# Altium PCB KC_Input_VAS.PcbDoc
Units mil, origin at the board's own origin, x right, y up, seen from the top; angles counter-clockwise.
Board outline 3000 x 1500 mil, 2 copper layers (Top Layer, Bottom Layer); 47 components, 30 nets, 106 pads, 0 vias.
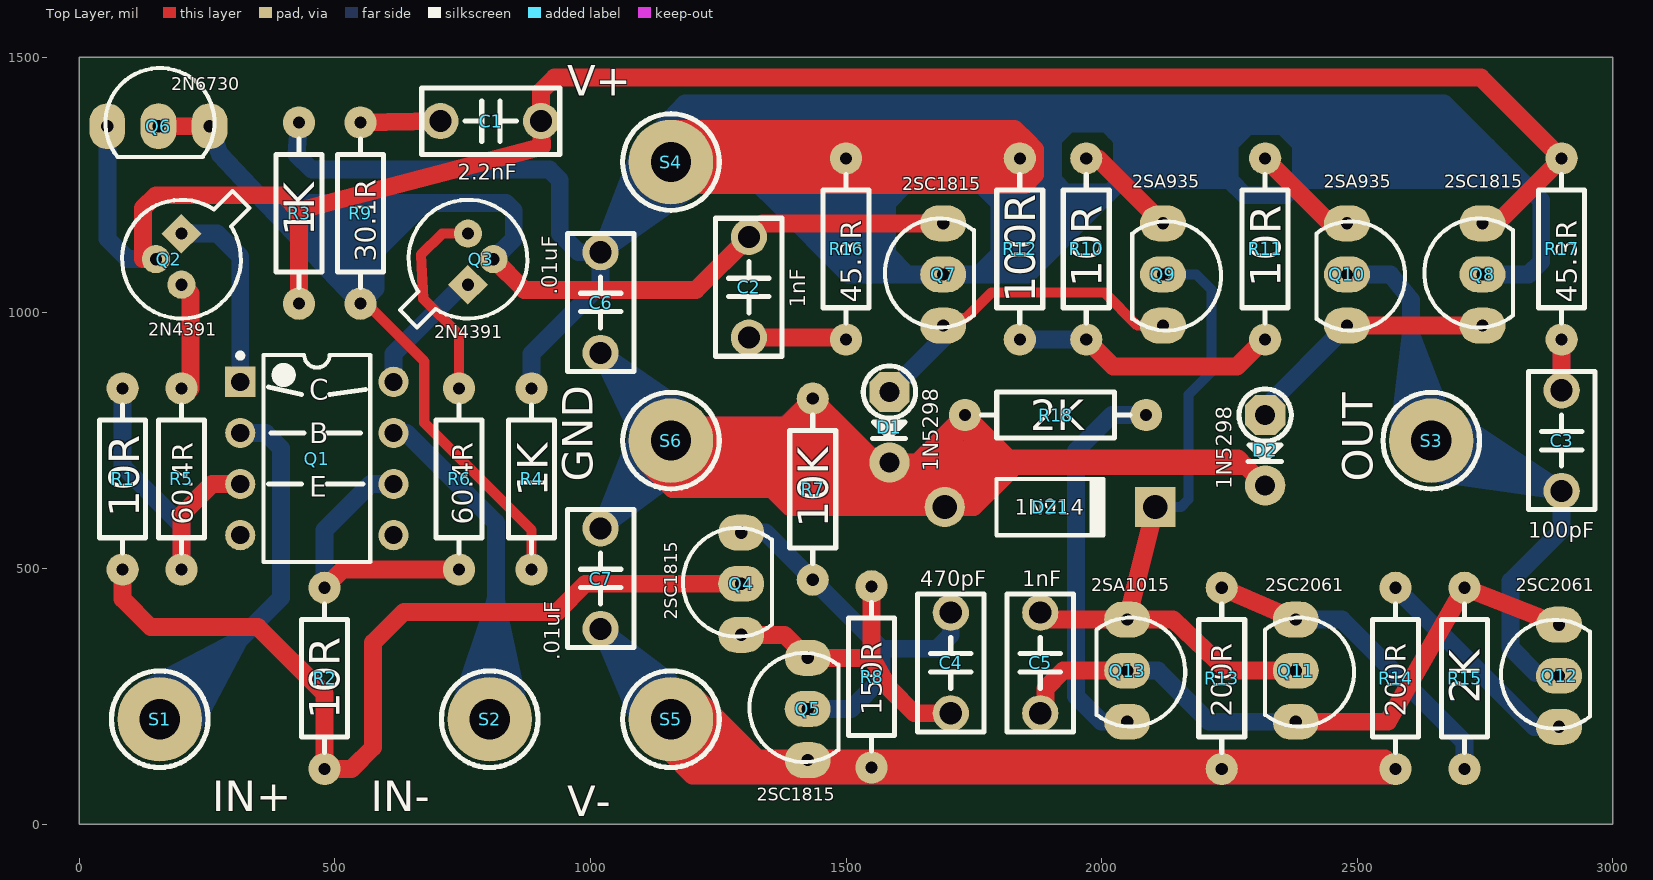
[diagram p0: Top Layer view]
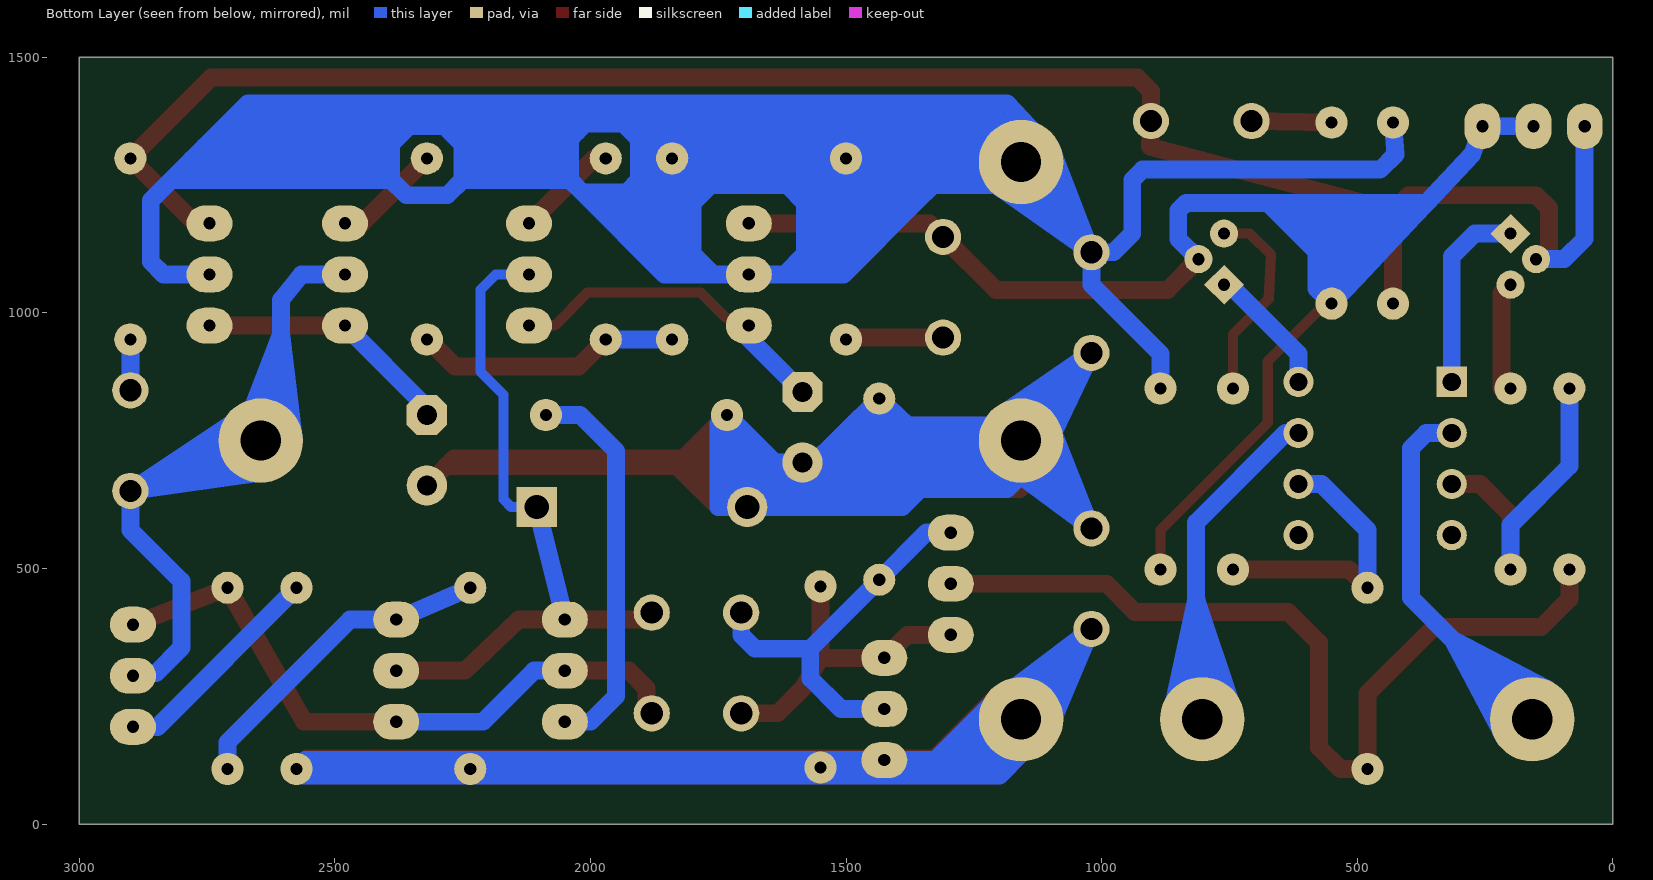
[diagram p1: Bottom Layer view, seen from below]

## Layer stack, top to bottom
Top Solder: solder mask 0.4, Solder Resist, Dk 3.5
Top Layer: signal copper 1.4
Dielectric 1: dielectric 12.6, FR-4, Dk 4.8
Bottom Layer: signal copper 1.4
Bottom Solder: solder mask 0.4, Solder Resist, Dk 3.5

## Board outline
0,0 3000,0 3000,1500 0,1500

## Design rules (kind name [scope] priority, off if disabled: settings)
Clearance [All] p1: gap=10 ignorepadtopadclearanceinfootprint=FALSE except(0: Arc-Hole Track-Hole SMDPad-Hole THPad-Hole Via-Hole Fill-Hole Poly-Hole Region-Hole Text-Hole)
PolygonConnect [All] p1: connectstyle=Relief reliefconductorwidth=10 reliefentries=4 polygonreliefangle="90 Angle" airgapwidth=10
RoomDefinition KC_Input_VAS_Schematic [InComponentClass('KC_Input_VAS_Schematic')] p1: confinementstyle=ConfineIn formatcopy=TRUE lockcomponents=FALSE outline 3045,60 14140,60 14140,675 3045,675
RoutingVias [All] p1: holewidth=28 width=50 viastyle="Through Hole" minholewidth=28 minwidth=50 maxholewidth=28 maxwidth=50
SolderMaskExpansion [All] p1: expansion=4
Width [All] p1: maxlimit=50 minlimit=10 preferedwidth=35
30 further rules are at their usual default settings.

## Components (designator, comment, footprint, x,y, rotation, side; value= is the part's Value field where it differs from the comment)
C1 "2.2nF" "CBB 6.3*6.3*5" 805,1375 r180 top
C2 "1nF" "CBB 6.3*6.3*5" 1310,1050 r90 top
C3 "100pF" "CBB 6.3*6.3*5" 2900,750 r90 top
C4 "470pF" "CBB 6.3*6.3*5" 1705,315 r270 top
C5 "1nF" "CBB 6.3*6.3*5" 1880,315 r270 top
C6 ".01uF" "CBB 6.3*6.3*5" 1020,1020 r270 top
C7 ".01uF" "CBB 6.3*6.3*5" 1020,480 r270 top
D1 "1N5298" DO-41V 1585,845 r270 top
D2 "1N5298" DO-41V 2320,800 r270 top
DZ1 "1N914" DO-41 1899.09,620 r0 top
Q1 "MAT-02" DIP-8 465,715 r0 top
Q2 "2N4391" TO-18_SMALLHOLE 200,1105 r270 top
Q3 "2N4391" TO-18_SMALLHOLE 760.5,1105 r90 top
Q4 "2SC1815" TO92A_SmallHole 1295,370 r180 top
Q5 "2SC1815" TO92A_SmallHole 1425,125 r180 top
Q6 "2N6730" TO92A_SmallHole 55,1365 r90 top
Q7 "2SC1815" TO92A_SmallHole 1690,975 r180 top
Q8 "2SC1815" TO92A_SmallHole 2745,975 r180 top
Q9 "2SA935" TO92A_SmallHole 2120,1175 r0 top
Q10 "2SA935" TO92A_SmallHole 2480,1175 r0 top
Q11 "2SC2061" TO92A_SmallHole 2380,400 r0 top
Q12 "2SC2061" TO92A_SmallHole 2895,190 r180 top
Q13 "2SA1015" TO92A_SmallHole 2050,400 r0 top
R1 "10R" "RS 1/4W" 85,675 r90 top
R2 "10R" "RS 1/4W" 480,285 r90 top
R3 "1K" "RS 1/4W" 430,1195 r90 top
R4 "1K" "RS 1/4W" 885,675 r90 top
R5 "60.4R" "RS 1/4W" 200,675 r90 top
R6 "60.4R" "RS 1/4W" 743,675 r90 top
R7 "10K" "RS 1/4W" 1435,655 r270 top
R8 "150R" "RS 1/4W" 1550,287.83 r270 top
R9 "30.1R" "RS 1/4W" 550,1195 r270 top
R10 "10R" "RS 1/4W" 1970,1125 r270 top
R11 "10R" "RS 1/4W" 2320,1125 r270 top
R12 "100R" "RS 1/4W" 1840,1125 r90 top
R13 "200R" "RS 1/4W" 2235,285 r90 top
R14 "200R" "RS 1/4W" 2575,285 r90 top
R15 "2K" "RS 1/4W" 2710,285 r270 top
R16 "45.3R" "RS 1/4W" 1500,1125 r90 top
R17 "45.3R" "RS 1/4W" 2900,1125 r90 top
R18 "2K" "RS 1/4W" 1910,800 r180 top
S1 "IN+" Screw-M2-s 157.5,205 r0 top
S2 "IN-" Screw-M2-s 803,205 r0 top
S3 "OUT" Screw-M2-s 2645,750 r0 top
S4 "V+" Screw-M2-s 1157.5,1295 r0 top
S5 "V-" Screw-M2-s 1157.5,205 r0 top
S6 "GND" Screw-M2-s 1157.5,750 r0 top

## Footprints (in the part's own frame and the unit in brackets; to place one, negate y for a bottom-side part, rotate by r counter-clockwise, add the part's x,y. Pads: shape width x height; smd on the part's side, far side on the other; paste and mask are expansions set on the pad)
"CBB 6.3*6.3*5" [mm] "脚距5mm高6.3mm厚3mm"
  round 1.8 hole 1.1: 1(-2.5,0) 2(2.5,0)
  silkscreen extent -3.43,-1.65 3.43,1.65, body extent -3.15,-1.5 3.15,1.5, height 6.8
DIP-8 [mm] "DIP; 8 Leads; Row Spacing 7.62 mm; Pitch 2.54 mm"
  rect 1.5x1.5 hole 0.9: 1(-3.81,3.81)
  round 1.5 hole 0.9: 2(-3.81,1.27) 3(-3.81,-1.27) 4(-3.81,-3.81) 5(3.81,-3.81) 6(3.81,-1.27) 7(3.81,1.27) 8(3.81,3.81)
  silkscreen extent -3.93,-5.15 2.65,5.23, body extent -3.6,-5.15 3.6,5.15, height 5.08
DO-41 [mm] "Diode, Axial; Body 5.2 x 2.7 mm (LxDia. max), Lead Dia. 0.86 mm (max)"
  round 2 hole 1.2: 1(-5.23,0)
  rect 2x2 hole 1.2: 2(5.23,0)
  silkscreen extent -2.65,-1.4 2.75,1.4
DO-41V [mm] "2.6*3.5mm(直径，脚距）"
  oct 2x2 hole 1: 1(0,0)
  round 2 hole 1: 2(3.5,0)
  silkscreen extent -1.3,-1.3 2.3,1.3, body extent -1.3,-1.3 3.9,1.3, height 6.9
"RS 1/4W" [mm] "直插色环电阻，脚距9mm，直径2.3mm"
  round 1.6 hole 0.6: 1(-4.5,0) 2(4.5,0)
  silkscreen extent -3.68,-1.14 3.68,1.14, body extent -4.72,-1.16 4.73,1.16, height 2.32
Screw-M2-s [mm]
  round 4.2 hole 2: 1(0,0)
  silkscreen extent -2.4,-2.4 2.4,2.4
TO92A_SmallHole [mil]
  oval 90x70 hole 24.02: 1(0,0) 2(0,-100) 3(0,-200)
  silkscreen extent -60,-209 114,4
TO-18_SMALLHOLE [mm] "Can; 3 Leads; Pin Circle Dia. 2.54 mm; Lead Dia. 0.48 mm (max)"
  rect 1.4x1.4 hole 0.61 rot 45: 1(-1.27,0)
  round 1.4 hole 0.61: 2(0,-1.27) 3(1.27,0)
  silkscreen extent -3.39,-2.95 2.95,3.39

## Part data
C1 C2 C3 C4 C5 C6 C7: library part C-CBB, "CBB电容", BOM名称=CBB电容, 学习资源=www.ooocke.com, 版权归属=源创客
D1 D2: library part 1N5xxx, "Current Regulator Diodes"
DZ1: library part 1N4619, "3V/0.5W稳压管", BOM名称=3V/0.5W稳压管, 学习资源=www.ooocke.com, 版权归属=源创客
Q1: "孪生对管-NPN型 40V/20ma"
Q2 Q3: "N沟道JFET开关管 40V/150ma"
Q4 Q5 Q7 Q8: "音频放大-NPN型"
Q6: library part 2N6728/6729/6730, "中功率放大-PNP型"
Q9 Q10: "音频功放-PNP型 50V/500ma"
Q11 Q12: "音频放大-NPN型 50V/500ma"
Q13: "音频放大-PNP型"
R1 R2 R3 R4 R5 R6 R7 R8 R9 R10 R11 R12 R13 R14 R15 R16 R17 R18: library part R-CRR, "直插色环电阻", BOM名称=色环电阻, 学习资源=www.ooocke.com, 版权归属=源创客
S1 S2 S3 S4 S5 S6: library part ScrewConnector, "Screw Connector"

## Nets (pads, with @x,y where several pads share a name; then routed paths per layer and width w, separated by ;. In a path a pad name is that pad's centre, name@x,y a point inside that pad or via, vN(x,y) a via of type N, cw(c..) or ccw(c..) an arc to the next point about the centre after c; other vN are vias at no path point)
GND: C6.2 C7.1 D1.2 D2.2 DZ1.1 R7.1 R18.2 S6.1 | length 13326.2
  Top Layer w20: 1280,720 1285,720 ; 1435,700 1425,710 1410,710 1405,705 1410,705 1430,685 1465,685 1430,720 1415,720 ; 1550,655 1545,655 ; 1626.59,686.59 1605,665 1575,665 1440,800 1400,760 1255,760 1250,760 1240,750 S6.1 1226.25,681.25 1232.5,675 1370,675 1405,640 1645,640 1625,660 1560,660 1440,780 1405,745 1275,745 1270,740 1270,705 1255,690 1380,690 1415,655 1545,655 ; 1680,675 1700,675 ; 1725,690 1725,700 1730,705 1745,690 1730,675 1725,675 1705,695 1700,695 1730,725 1765,690 ; 1760,685 1730,655 1710,675 1700,675 ; 1795,690.83 1795,695 ; 1817.83,715 1780,715 1730,765 1655,690 1680,665 1700,665 1720,645 1745,645 1790,690 1795,695 ; 1285,720 1285,730 1405,730 1430,755 1445,755 1545,655 ; 1285,720 1285,705 1390,705 1420,675 1500,675 ; 1285,720 1415,720 ; 1415,720 1435,740 1500,675 ; 1500,675 1510,665 1520,665 1510,675 1500,675 ; 1700,675 1685,690 1675,690 1725,740 1735,740 1775,700 1795,700 1795,695
  Top Layer w35: S6.1@1105,715 ccw(c1117.07,715) 1108.54,706.46 1160,655 1355,655 1390,620 DZ1.1 ; S6.1@1180,675 1211.15,675 ccw(c1211.15,696.35) 1226.25,681.25 ; S6.1@1185,785 1190,780 1255,780 ; 1220,675 1225.71,680.71 ccw(c1155,751.42) 1226.25,681.25 ; 1760,685 1790,690 1795,690.83 ; D2.2 2282.2,700 ; 1226.25,681.25 ccw(c1155,751.42) 1255,751.42 1255,760 1255,780 ; 1255,780 1382.83,780 R7.1 1559.96,707.2 D1.2 D1.2@1605.98,707.2 ; D1.2@1605.98,707.2 1626.59,686.59 DZ1.1 ; D1.2@1605.98,707.2 1640.04,707.2 R18.2 1817.83,715 ; DZ1.1 1750,620 1817.83,687.83 ; 1817.83,687.83 1817.83,692.83 ; 1817.83,687.83 1830,700 2282.2,700 ; 1817.83,692.83 1840,715 ; 1817.83,692.83 1817.83,715 ; 1817.83,715 1840,715 ; 1840,715 2267.2,715 2282.2,700
  Bottom Layer w35: 1075,685 C7.1 ; 1080,820 C6.2 ; S6.1@1095,765 S6.1@1094.48,766.09 ; S6.1@1100,780 1097.54,773.8 S6.1@1094.48,766.09 ; S6.1@1105,745 C7.1 ; 1110,665 C7.1 ; S6.1@1145,805 C6.2 ; S6.1@1155,685 S6.1@1158.43,681.57 ; S6.1@1190,805 C6.2 ; S6.1@1200,690 1200,685 1230,655 ; S6.1@1210,720 S6.1@1197.11,710.39 ; 1390,780 1380.53,780 ; 1445,730 1385,730 1430,750 1490,705 1330,705 1348.84,720.25 ; D1.2@1585,685 D1.2@1576.02,693.81 ; C7.1 S6.1@1158.43,681.57 ; C7.1 S6.1@1094.48,766.09 ; C7.1 S6.1 ; C6.2 S6.1@1094.48,766.09 ; C6.2 S6.1 ; S6.1 S6.1@1187.25,720.25 ; S6.1 1187.5,780 1260,780 ; S6.1 S6.1@1178.58,696.59 ; S6.1 1325,755 1277.62,720.25 ; S6.1 1260,780 ; S6.1@1158.43,681.57 S6.1@1178.58,696.59 ; S6.1@1158.43,681.57 1185,655 1195,655 ; S6.1@1178.58,696.59 1190.62,705.56 S6.1@1197.11,710.39 ; S6.1@1178.58,696.59 1195,655 ; S6.1@1187.25,720.25 S6.1@1197.11,710.39 ; S6.1@1187.25,720.25 1277.62,720.25 ; 1195,655 1230,655 ; S6.1@1197.11,710.39 1221.94,685.56 ; 1221.94,685.56 1230,677.5 1230,655 ; 1221.94,685.56 1281.91,685.56 ; 1230,655 1250,655 ; 1250,655 1355,655 ; 1250,655 1281.91,685.56 ; 1260,780 1380.53,780 ; 1277.62,720.25 1250,700 1286.76,690.2 ; 1277.62,720.25 1318.14,720.25 ; 1281.91,685.56 1286.76,690.2 ; 1281.91,685.56 1304.15,685.56 ; 1286.76,690.2 1304.15,685.56 ; 1286.76,690.2 1318.14,720.25 ; 1304.15,685.56 1325,680 1540,680 1435,790 1348.84,720.25 ; 1318.14,720.25 1380.53,780 ; 1318.14,720.25 1348.84,720.25 ; 1355,655 1550,655 ; 1355,655 1390,620 DZ1.1 ; 1380.53,780 R7.1 1573.9,695.89 D1.2@1576.02,693.81 ; 1550,655 1665,655 1665,688.62 ; 1550,655 D1.2@1576.02,693.81 ; D1.2@1576.02,693.81 D1.2 ; D1.2 1603.58,688.62 1665,688.62 ; D1.2 1640.04,707.2 1678.92,746.08 ; 1665,688.62 1693.19,716.81 DZ1.1@1693.19,643.19 ; 1678.92,746.08 1693.92,761.08 ; 1678.92,746.08 1715,710 1715,690 1727.5,677.5 ; DZ1.1 DZ1.1@1693.19,643.19 ; DZ1.1 1750,620 ; DZ1.1@1693.19,643.19 1727.5,677.5 ; 1693.92,761.08 1732.83,722.17 ; 1693.92,761.08 R18.2 ; 1727.5,677.5 1732.83,672.17 1732.83,637.17 1750,620 ; 1732.83,722.17 1750,705 ; 1732.83,722.17 R18.2 ; 1732.83,722.17 1732.83,682.83 1750,700 ; R18.2 1750,782.83 1750,705 ; 1750,620 1750,700 ; 1750,700 1750,705
NetC1_1: C1.1 Q2.2 Q6.1 Q8.3 R3.1 R17.2 | length 3846.8
  Top Layer w35: Q2.2 125,1105 125,1205 150,1230 400,1230 430,1200 ; R3.1 430,1200 ; Q8.3 2772.83,1175 R17.2 2742.17,1460 930,1460 903.43,1433.43 C1.1 905,1325 430,1200
  Bottom Layer w35: Q6.1 55,1145 95,1105 Q2.2
NetC1_2: C1.2 R9.1 | length 156.6
  Top Layer w35: R9.1 C1.2
NetC2_1: C2.1 R16.1 | length 191.5
  Top Layer w35: C2.1 1496.26,951.57 R16.1
NetC2_2: C2.2 Q3.2 Q6.2 Q6.3 Q7.3 R4.1 R9.2 | length 4645.2
  Top Layer w20: R9.2 562.17,1017.83 675,905 675,785 885,575 R4.1@885,519.83 ; R4.1@863,497.83 R4.1@885,519.83 ; R4.1 R4.1@885,519.83
  Top Layer w35: Q6.2 Q6.3 ; Q3.2 870.5,1045 1206.57,1045 C2.2 1336.57,1175 Q7.3
  Bottom Layer w20: 388.77,1189.13 604.13,1189.13 ; 455,1160 460,1160 ; 485,1145 505,1145 ; 502.83,1067.95 502.83,1097.17 ; 624.13,1189.13 619.13,1189.13 ; 460,1160 495,1125 ; 460,1160 555,1160 540,1145 ; 495,1125 502.83,1125 ; 495,1125 500,1120 502.83,1122.83 ; 502.83,1097.17 550,1050 555,1050 555,1125 619.13,1189.13 ; 502.83,1097.17 425,1175 585,1175 555,1145 ; 502.83,1097.17 502.83,1122.83 ; 502.83,1122.83 505,1125 ; 502.83,1122.83 502.83,1125 ; 502.83,1125 505,1125 ; 502.83,1125 502.83,1142.83 505,1145 ; 505,1125 525,1145 ; 505,1125 520,1125 ; 505,1145 525,1145 ; 520,1125 540,1145 ; 520,1125 520,1090 540,1070 540,1130 555,1145 ; 525,1145 540,1145 ; 540,1145 555,1145 ; 555,1145 560,1145 604.13,1189.13 ; 604.13,1189.13 630,1215 630,1200 619.13,1189.13 ; 604.13,1189.13 619.13,1189.13
  Bottom Layer w35: Q6.2 Q6.3 275,1310 365,1214.38 ; Q3.2 850,1144.5 850,1200 835,1215 675,1215 ; 365,1214.38 388.77,1189.13 502.83,1067.95 R9.2 580,1047.83 580,1120 675,1215 ; 365,1214.38 365.62,1215 630,1215 675,1215
NetC3_1: C3.1 Q10.2 Q12.2 S3.1 | length 2842
  Bottom Layer w35: Q10.2 2565,1075 2605,1025 2605,960 ; S3.1@2580,755 2580.35,757.88 2605,960 ; S3.1@2585,760 2605,960 ; 2605,835 2605,960 ; S3.1@2625,690 2636.39,688.41 C3.1 ; S3.1@2635,820 2605,960 ; S3.1 C3.1 ; S3.1@2670,790 2605,960 ; S3.1@2670,805 2678.09,799.6 C3.1 ; S3.1@2680,785 C3.1 ; S3.1@2685,705 C3.1 ; Q12.2 2850,295 2800,345 2800,475 2900,575 C3.1
NetC3_2: C3.2 R17.1 | length 198.8
  Top Layer w35: C3.2 R17.1
  Bottom Layer w35: C3.2 R17.1
NetC4_1: C4.1 Q4.3 Q5.2 R7.2 | length 786.5
  Bottom Layer w35: Q4.3 1342.83,570 R7.2 1570,342.83 ; Q5.2 1510,225 1570,285 1570,342.83 ; C4.1 1705,370 1677.83,342.83 1570,342.83
NetC4_2: C4.2 Q4.1 Q5.3 R8.1 | length 623.2
  Top Layer w35: Q4.1 1380,370 Q5.3 1550,325 ; R8.1 1550,325 ; C4.2 1633.43,216.57 1585,265 1550,325
NetC5_1: C5.1 DZ1.2 Q9.2 Q11.2 Q13.1 | length 1596.4
  Top Layer w35: C5.1@1890,413.43 1903.43,400 Q13.1 ; DZ1.2 Q13.1 ; Q11.2 2245,300 2140,400 Q13.1
  Bottom Layer w20: DZ1.2 2155,620 2170,635 2170,840 2215,885 2215,1045 2185,1075 Q9.2
  Bottom Layer w35: Q13.1 DZ1.2
NetC5_2: C5.2 Q11.3 Q12.3 Q13.2 R15.1 | length 1275
  Top Layer w35: C5.2@1890,216.57 1890,265 1925,300 Q13.2 ; Q11.3 2560,200 R15.1 Q12.3
  Bottom Layer w35: Q13.2 2110,300 2210,200 Q11.3
NetC6_1: C6.1 Q7.2 Q8.2 R3.2 R4.2 R12.2 R16.2 S4.1 | length 19894.6
  Top Layer w35: S4.1@1165,1360 1830,1360 1855,1335 ; S4.1@1180,1245 1185,1250 1850,1250 1870,1270 ; S4.1@1164.67,1302.17 R16.2 R12.2 1855,1287.17 1855,1270 ; S4.1@1164.67,1302.17 S4.1 1182.5,1270 1855,1270 ; S4.1@1164.67,1302.17 1197.5,1335 1855,1335 ; 1855,1270 1870,1270 ; 1855,1335 1870,1320 1870,1270
  Bottom Layer w35: R3.2 425,1310 455,1280 920,1280 940,1260 940,1155 976.57,1118.43 C6.1 ; R4.2 885,920 1020,1055 C6.1 ; 1080,1250 C6.1 ; 1100,1230 C6.1 ; S4.1@1100,1325 1097.4,1318.28 C6.1 ; S4.1@1115,1335 1185,1410 1235,1410 ; 1130,1215 C6.1 ; S4.1@1200,1245 1195.09,1241.55 C6.1 ; 1495,1180 1495,1160 1450,1205 1520,1205 1520,1105 ; 1530,1095 1520,1105 ; 1860,1150 1860,1165 ; 1910,1215 1900,1205 ; Q8.2 2835,1075 2860,1100 2860,1220 2820,1260 ; S4.1 1157.5,1332.5 1235,1410 ; S4.1 1160,1295 S4.1@1167.17,1302.17 ; S4.1 S4.1@1182.5,1270 ; S4.1 S4.1@1164.67,1302.17 ; S4.1@1164.67,1302.17 S4.1@1167.17,1302.17 ; S4.1@1164.67,1302.17 S4.1@1199.67,1337.17 ; S4.1@1167.17,1302.17 S4.1@1202.17,1337.17 ; S4.1@1167.17,1302.17 R16.2 ; S4.1@1182.5,1270 1500,1270 R16.2 ; S4.1@1182.5,1270 1202.5,1250 1330,1250 ; S4.1@1199.67,1337.17 S4.1@1202.17,1337.17 ; S4.1@1199.67,1337.17 1227.5,1365 1230,1365 ; S4.1@1202.17,1337.17 1805,1337.17 R12.2 ; S4.1@1202.17,1337.17 1230,1365 ; 1230,1365 1815,1365 1840,1340 ; 1230,1365 1252.5,1387.5 1840,1387.5 ; 1235,1410 2670,1410 2692.5,1387.5 ; 1330,1250 1615,1250 ; 1330,1250 1362.5,1217.5 ; 1362.5,1217.5 1370,1225 1565,1225 1545,1205 1545,1110 1580,1075 ; 1362.5,1217.5 1505,1075 1580,1075 ; 1362.5,1217.5 1407.5,1217.5 1520,1105 ; R16.2 R12.2 ; R16.2 1527.17,1275 R12.2@1840,1275 ; 1580,1075 1620,1075 ; 1615,1250 1580,1215 1580,1115 1620,1075 ; 1615,1250 1765,1250 ; 1620,1075 1760,1075 ; 1760,1075 1800,1115 1800,1215 ; 1760,1075 1810,1075 ; 1765,1250 1800,1215 ; 1765,1250 1835,1250 ; 1800,1215 1835,1250 ; 1810,1075 1810,1085 1835,1110 1835,1250 ; 1810,1075 1855,1075 2015,1235 ; 1810,1075 1910,1175 ; 1835,1250 1895,1250 1905,1260 ; 1835,1250 1840,1255 R12.2@1840,1275 ; R12.2@1840,1275 R12.2 ; R12.2 R12.2@1847.83,1302.17 ; R12.2 1870,1332.17 ; R12.2 1840,1340 ; 1840,1340 1840,1387.5 ; 1840,1387.5 1870,1387.5 ; R12.2@1847.83,1302.17 R12.2@1870,1302.17 ; R12.2@1847.83,1302.17 R12.2@1862.5,1287.5 ; 1860,1165 1860,1225 1960,1225 ; 1860,1165 1900,1205 ; R12.2@1862.5,1287.5 1845,1270 1880,1270 R12.2@1862.5,1287.5 ; R12.2@1862.5,1287.5 1870,1295 R12.2@1870,1302.17 ; R12.2@1870,1302.17 1870,1332.17 ; R12.2@1870,1302.17 1902.83,1302.17 1905,1300 ; 1870,1332.17 1905,1367.17 1905,1387.5 ; 1870,1332.17 1870,1387.5 ; 1870,1387.5 1905,1387.5 ; 1900,1205 1900,1185 1910,1175 ; 1905,1260 1930,1235 1960,1235 ; 1905,1260 1905,1300 ; 1905,1300 1905,1340 1935,1370 2010,1370 2025,1355 ; 1905,1387.5 2692.5,1387.5 ; 1910,1175 1960,1225 ; 1960,1225 1960,1235 ; 1960,1235 2015,1235 ; 2015,1235 2040,1260 ; 2025,1355 2270,1355 2272.5,1352.5 ; 2025,1355 2040,1340 ; 2040,1260 2250,1260 ; 2040,1260 2040,1285 ; 2040,1285 2250,1285 ; 2040,1285 2040,1305 ; 2040,1305 2250,1305 ; 2040,1305 2040,1340 ; 2040,1340 2050,1330 2250,1330 ; 2250,1260 2280,1230 2360,1230 2390,1260 ; 2250,1260 2250,1285 ; 2250,1285 2250,1305 ; 2250,1305 2250,1330 ; 2250,1330 2272.5,1352.5 ; 2272.5,1352.5 2285,1365 2355,1365 2370,1350 ; 2370,1350 2380,1360 2720,1360 ; 2370,1350 2390,1330 ; 2390,1260 2820,1260 ; 2390,1260 2390,1290 ; 2390,1290 2770,1290 2780,1300 ; 2390,1290 2390,1330 ; 2390,1330 2395,1325 2755,1325 ; 2692.5,1387.5 2720,1360 ; 2720,1360 2755,1325 ; 2755,1325 2780,1300 ; 2780,1300 2820,1260
NetC7_2: C7.2 Q5.1 R8.2 R13.1 R14.1 S5.1 | length 11199.6
  Top Layer w35: S5.1@1195,245 1210.71,245 1327.87,127.83 ; 1250,185 1311.93,127.83 ; S5.1@1157.5,182.5 S5.1 ; S5.1@1157.5,182.5 1157.5,137.5 1200,95 1245,95 ; S5.1@1157.5,182.5 1245,95 ; S5.1 S5.1@1185,205 ; S5.1 1254.67,107.83 1585,107.83 ; S5.1@1185,205 1234.76,205 1311.93,127.83 ; S5.1@1185,205 1265,125 ; 1245,95 2562.17,95 R14.1 ; 1265,125 1267.83,127.83 1311.93,127.83 ; 1265,125 1315,125 ; 1311.93,127.83 1315,125 ; 1311.93,127.83 1327.87,127.83 ; 1315,125 1330,125 ; 1327.87,127.83 2555,127.83 R14.1 ; 1327.87,127.83 1330,125 ; 1330,125 Q5.1 1567.83,125 1585,107.83 ; 1585,107.83 R13.1 R14.1
  Bottom Layer w20: S5.1 S5.1@1157.5,227.5
  Bottom Layer w35: 1085,270 C7.2 ; S5.1@1105,180 1103.98,182.43 C7.2 ; 1120,295 C7.2 ; S5.1@1195,145 1243.42,96.58 ; S5.1@1200,245 1192.29,250.85 C7.2 ; S5.1@1220,230 1308.33,141.67 ; 1260,155 1276.91,144.85 ; 1265,175 1308.33,141.67 ; 1585,107.83 1587.17,107.83 ; 1585,110 1587.17,107.83 ; C7.2 S5.1 ; S5.1 1157.5,137.5 1200,95 1241.83,95 1243.42,96.58 ; S5.1 S5.1@1195,205 ; S5.1 1237.5,125 ; S5.1@1195,205 1216.76,205 1276.91,144.85 ; S5.1@1195,205 1275,125 ; 1237.5,125 1275,125 ; 1237.5,125 1254.67,107.83 ; 1243.42,96.58 1245,95 1267.5,95 ; 1243.42,96.58 1254.67,107.83 ; 1254.67,107.83 1587.17,107.83 ; 1254.67,107.83 1267.5,95 ; 1267.5,95 1550,95 2562.17,95 R14.1 ; 1275,125 1310,125 ; 1276.91,144.85 1310,125 ; 1308.33,141.67 1325,125 ; 1310,125 1325,125 ; 1325,125 Q5.1 2557.83,125 R14.1 ; 1587.17,107.83 R13.1 R14.1
NetD1_2: D1.1 Q7.1 Q9.3 | length 657.3
  Top Layer w20: Q7.1 1705,990 1735,990 1785,1040 2005,1040 2070,975 Q9.3
  Bottom Layer w35: D1.1 1690,950 Q7.1
NetD2_2: D2.1 Q8.1 Q10.3 | length 526.3
  Top Layer w35: Q10.3 Q8.1
  Bottom Layer w35: D2.1@2340,800 D2.1 2320,815 Q10.3
NetQ1_1: Q1.1 Q2.1 | length 378.6
  Bottom Layer w35: Q2.1 270,1155 315,1110 Q1.1
NetQ1_2: Q1.2 S1.1 | length 1441.8
  Bottom Layer w35: S1.1@130,265 312.5,360 ; S1.1 312.5,360 ; S1.1@180,280 312.5,360 ; S1.1@210,165 215.11,174.72 312.5,360 ; 240,240 312.5,360 ; Q1.2 365,765 395,735 395,442.5 312.5,360
NetQ1_3: Q1.3 R1.2 R5.1 | length 649
  Top Layer w35: R5.1 200,605 260,665 Q1.3
  Bottom Layer w35: R1.2 85,700 200,585 R5.1
NetQ1_5: Q1.6 R2.2 R6.1 | length 572.9
  Top Layer w35: R2.2 515.67,497.83 R6.1
  Bottom Layer w35: R2.2 480,575 570,665 Q1.6 Q1.6@625,665
NetQ1_6: Q1.7 S2.1 | length 1582.1
  Bottom Layer w35: Q1.7 640,765 815,590 815,440 ; S2.1@745,230 815,440 ; 780,310 815,440 ; S2.1@795,260 815,440 ; S2.1 815,217 815,440 ; 840,295 815,440 ; S2.1@865,210 863.24,218.1 815,440
NetQ1_7: Q1.8 Q3.1 | length 256.4
  Bottom Layer w35: Q1.8 615,920 750,1055 Q3.1
NetQ2_2: Q2.3 R5.2 | length 210.1
  Top Layer w35: Q2.3 217.5,1037.5 R5.2@217.5,852.17
NetQ3_2: Q3.3 R6.2 | length 399.6
  Top Layer w20: R6.2 743,957.73 673.19,1027.53 668.42,1113.42 710,1155 Q3.3
NetQ4_2: Q4.2 R1.1 R2.1 | length 1761.7
  Top Layer w35: R1.1 85,440 140,385 350,385 480,255 R2.1 532.83,107.83 575,150 575,355 635,415 935,415 990,470 Q4.2
NetQ9_1: Q9.1 R10.1 | length 202.7
  Top Layer w35: R10.1 1992.83,1302.17 Q9.1
NetQ10_1: Q10.1 R11.1 | length 212.7
  Top Layer w35: R11.1 2447.17,1175 Q10.1
NetQ11_1: Q11.1 R13.2 R15.2 | length 797.1
  Top Layer w35: R13.2 Q11.1
  Bottom Layer w35: R13.2 Q11.1 2470,400 2710,160 R15.2
NetQ12_1: Q12.1 R14.2 | length 432.7
  Bottom Layer w35: R14.2 2847.17,190 Q12.1
NetQ13_3: Q13.3 R18.1 | length 766.9
  Bottom Layer w35: Q13.3 2000,200 1950,250 1950,730 2020,800 R18.1
NetR10_2: R10.2 R11.2 R12.1 | length 523.8
  Top Layer w35: R10.2 2022.83,895 2265,895 2317.83,947.83 R11.2
  Bottom Layer w35: R12.1 R10.2
pads on no net: Q1.4 Q1.5

## Silkscreen, mask and mechanical layers (free items; w line width, h text height)
Top Overlay:
  lines w10: 370,665 435,665 ; 370,855 435,840 ; 375,765 440,765 ; 485,665 555,665 ; 485,765 550,765 ; 490,840 560,850
  text "C" at 450,830 h40
  text "B" at 450,745 h40
  text "E" at 450,640 h40
Mechanical 1:
  the board outline again, w10
Drill Drawing:
  the board outline again, w10